# EAGLE board DARTMOBO-basic (EAGLE 7.6.0)
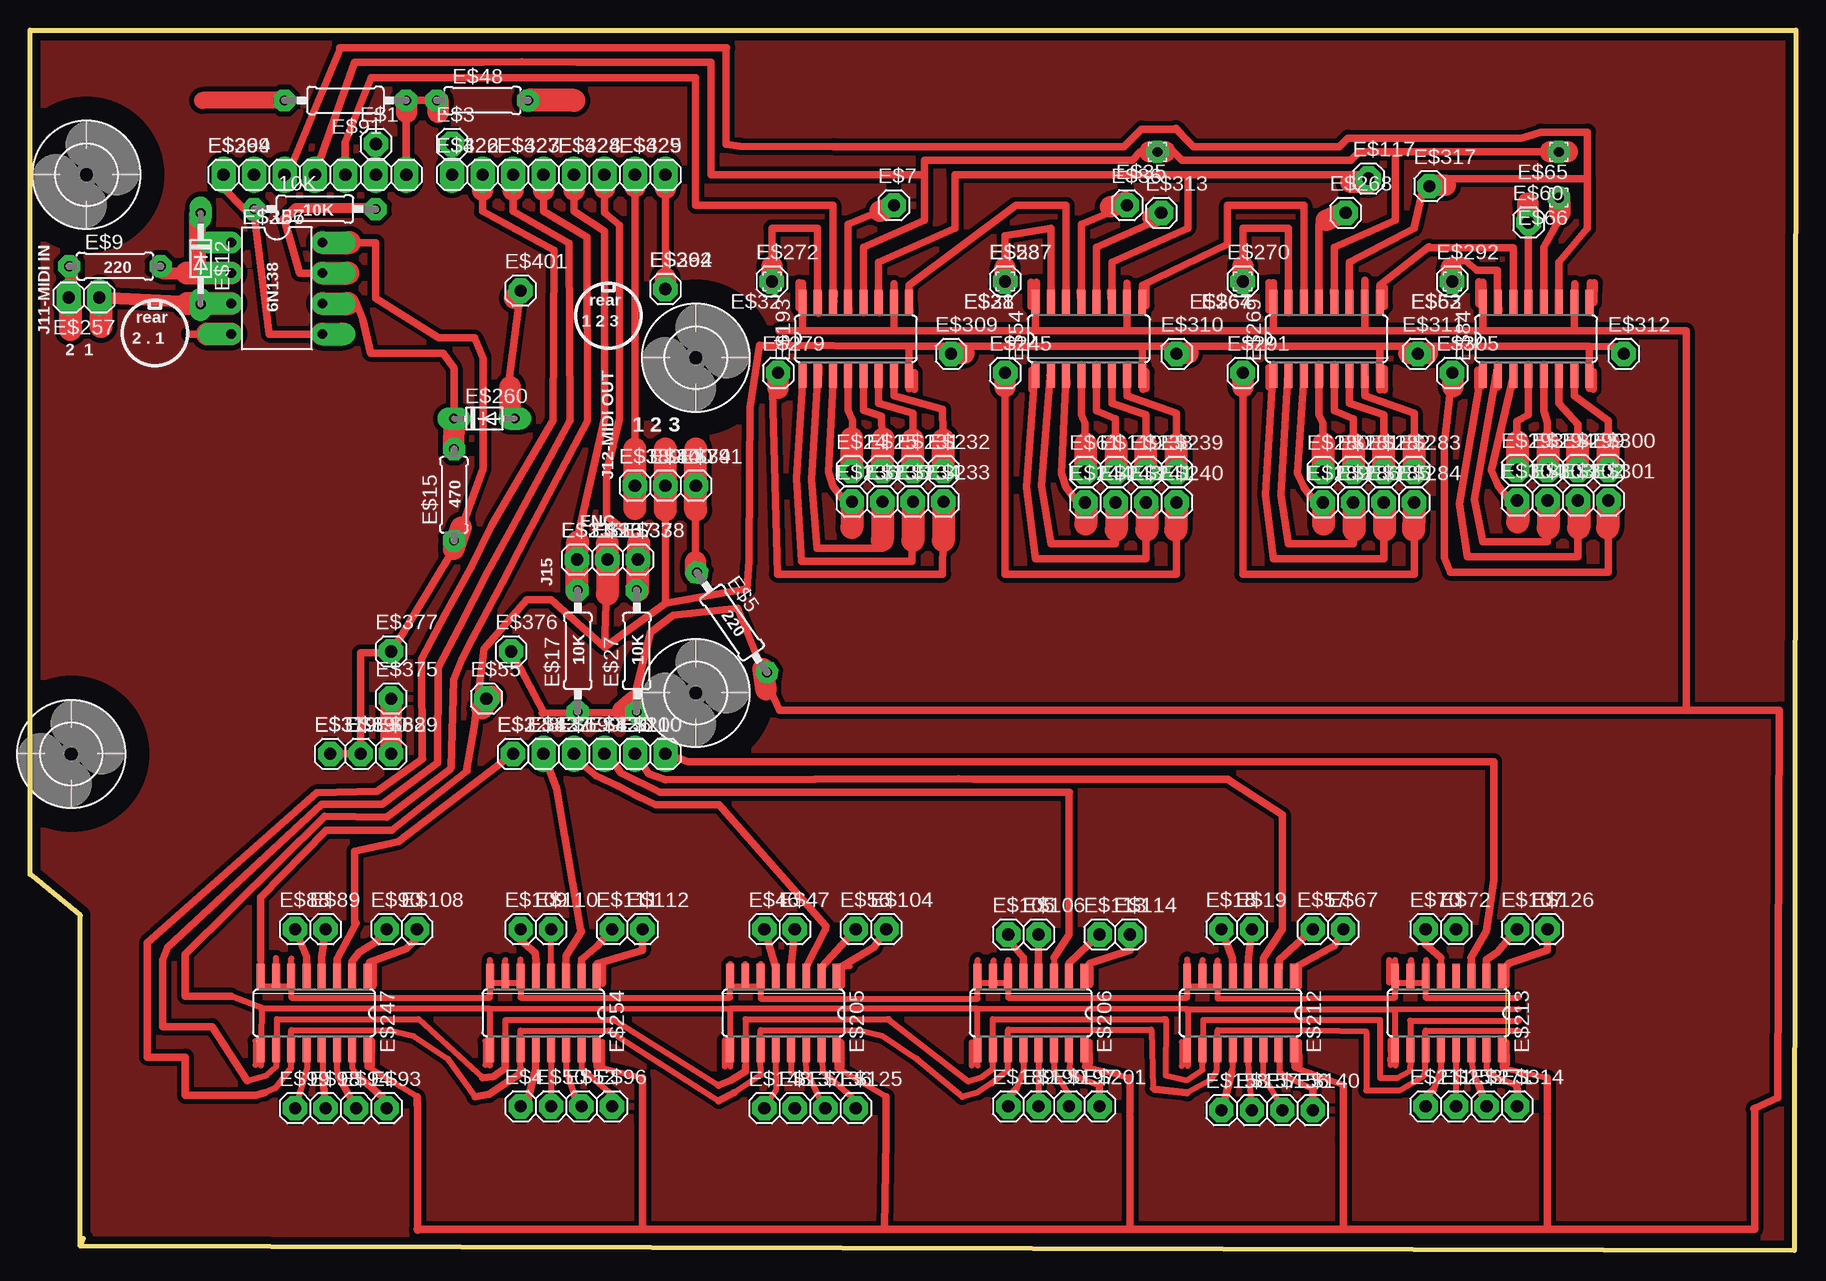
[diagram p0: board, top side]
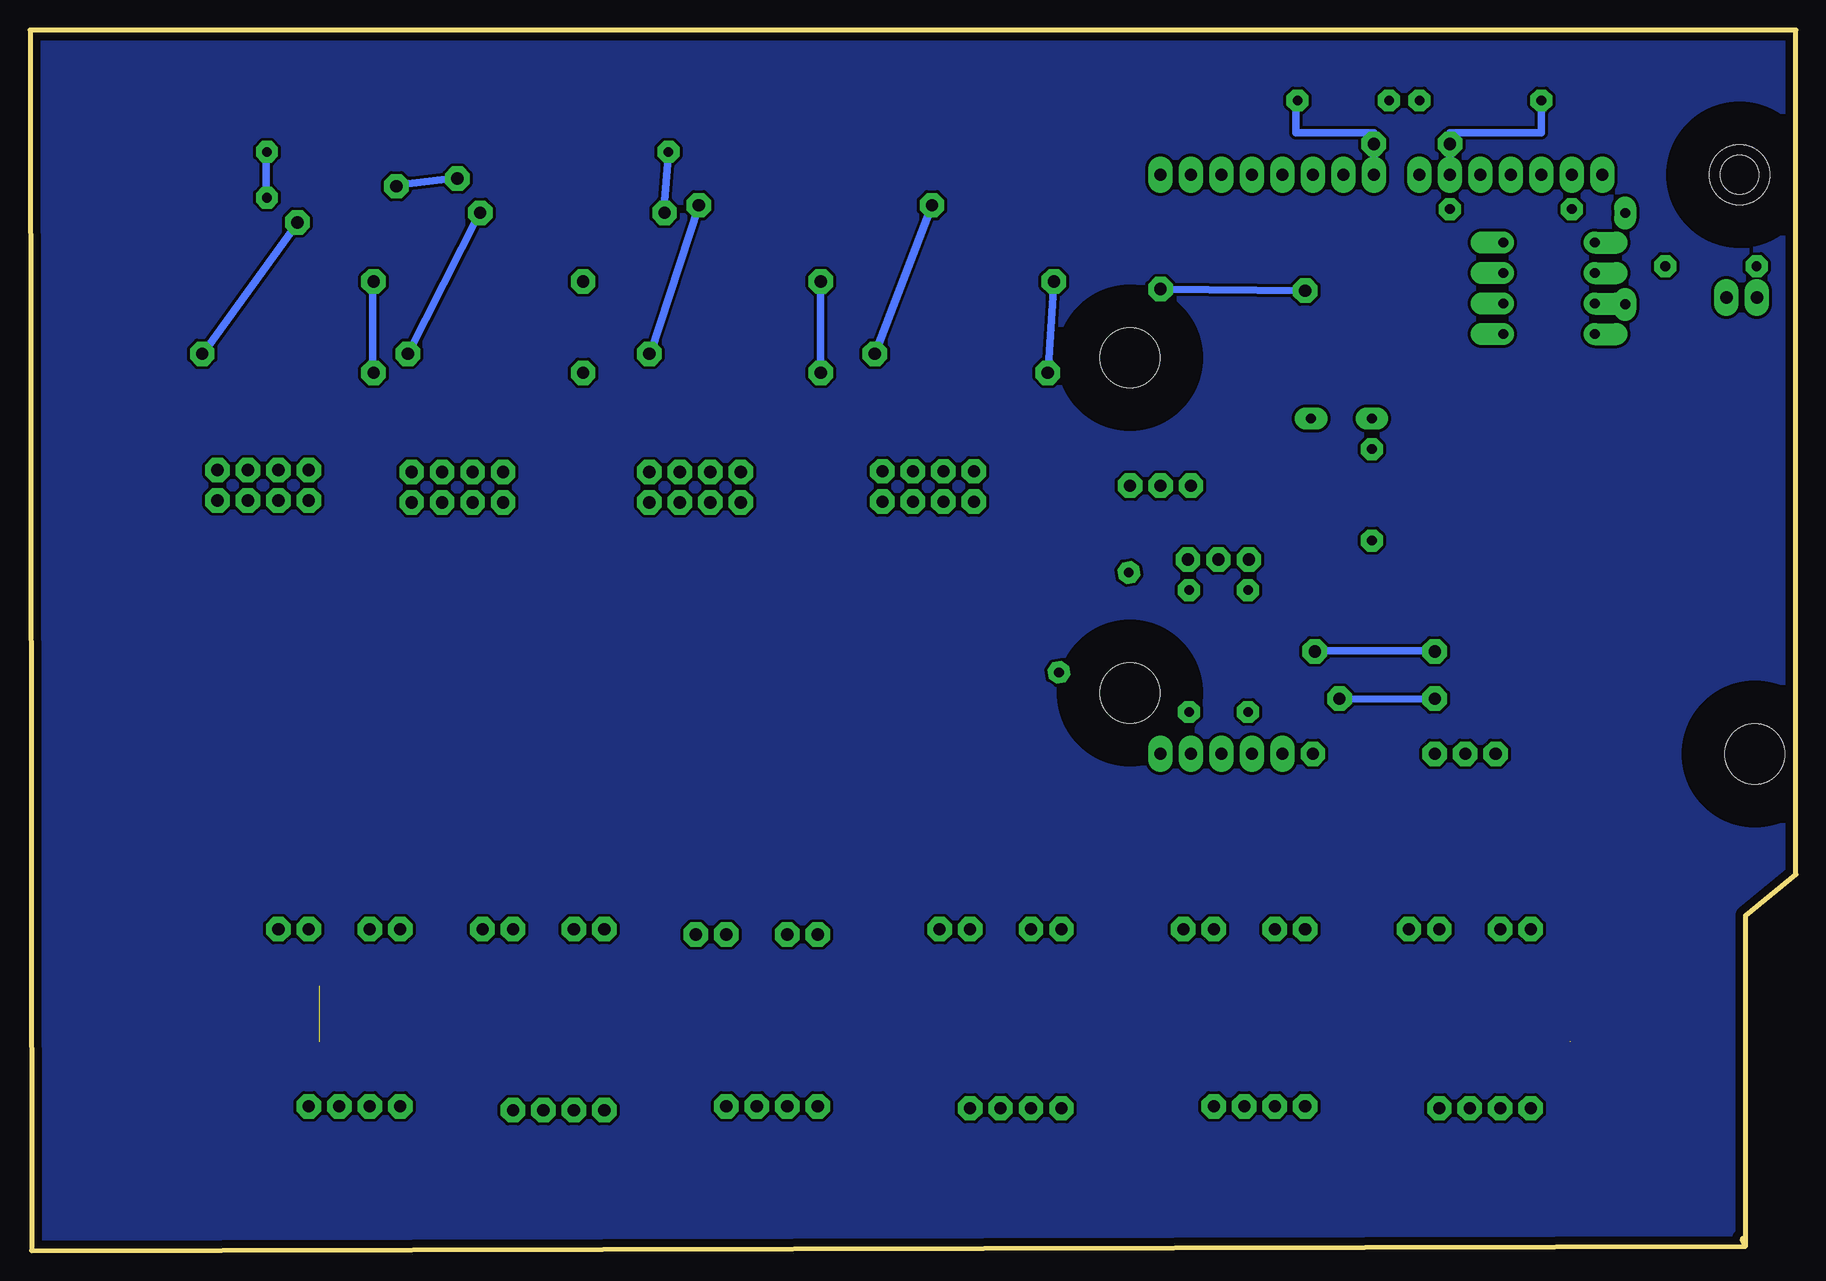
[diagram p1: board, bottom side, seen from below]

Size 147.19 x 101.73 mm. Coordinates in mm from the lower left corner, seen from the top.
Outline: 4.19,0.38 147.07,0 147.19,101.73 0,101.73 0,31.37 4.19,27.94 4.19,0.38
Outline: 4.19,0.38 4.45,1.02
Copper layers (1*16): Top 0.035mm / dielectric 1.5mm / Bottom 0.035mm
Design rules "default *": minimum track width 10mil, minimum drill 22mil, track to track 10mil, track to pad 10mil, pad to pad 10mil, via to via 12mil, smd to smd 8mil, copper to edge 26mil, drill to drill 12mil, minimum pad ring 20mil, minimum via ring 20mil, stop-mask expansion 1mil, vias tented up to drill 30mil, thermal gap 10mil
Net classes: 1 power: width 0.61 mm, drill 0.61 mm, clearance 0.254 mm; 2 gnd: width 0.305 mm, drill 0.559 mm, clearance 0.254 mm; 3 usbvcc: width 0.508 mm, drill 0.61 mm, clearance 0.254 mm; 4 aref: width 0.406 mm, drill 0.61 mm, clearance 0.254 mm
Holes 3.2 mm at 4.7,89.66 4.7,89.66

## Footprints (pad centres in the part's own frame; a part is rotated, then mirrored left to right if it is on the bottom)
0207/10 = drill 0.813 octagon: 1 -5.08,0; 2 5.08,0
1X01 = drill 1.016 octagon: 1 0,0
1X02 = drill 1.016 long: 1 -1.27,0; 2 1.27,0
0207/7 = drill 0.813 octagon: 1 -3.81,0; 2 3.81,0
DO34-7 = drill 0.813 long: A 3.81,0; C -3.81,0
1,6/0,8 = drill 0.813 pad 1.6 octagon: 1 0,0
SO16 = smd 0.66 x 2.032: 1 -4.445,-3.073; 2 -3.175,-3.073; 3 -1.905,-3.073; 4 -0.635,-3.073; 5 0.635,-3.073; 6 1.905,-3.073; 7 3.175,-3.073; 8 4.445,-3.073; 9 4.445,3.073; 10 3.175,3.073; 11 1.905,3.073; 12 0.635,3.073; 13 -0.635,3.073; 14 -1.905,3.073; 15 -3.175,3.073; 16 -4.445,3.073
DIL08 = drill 0.813 offset: 1 -3.81,-3.81; 2 -1.27,-3.81; 3 1.27,-3.81; 4 3.81,-3.81; 5 3.81,3.81; 6 1.27,3.81; 7 -1.27,3.81; 8 -3.81,3.81
DO34-5 = drill 0.813 long: A 2.54,0; C -2.54,0
1X07 = drill 1.016 long: 1 -7.62,0; 2 -5.08,0; 3 -2.54,0; 4 0,0; 5 2.54,0; 6 5.08,0; 7 7.62,0
5,0 = hole 5: 0,0

## Placement (x,y rotation side)
10K  10K  [0207/10]  23.75,86.8 0 top
E$1  [1X01]  28.83,92.23 0 top
E$2  [1X01]  40.26,41.4 0 top
E$3  [1X01]  35.18,92.23 0 top
E$4  [1X01]  40.89,12.03 0 top
E$5  [0207/10]  58.52,52.36 305 top
E$6  [1X02]  46.61,41.4 0 top
E$7  [1X01]  72.01,87.12 0 top
E$9  [0207/7]  7.08,82.04 0 top
E$11  [1X02]  51.69,41.4 0 top
E$12  [DO34-7]  14.22,82.68 270 top
E$15  [0207/7]  35.34,62.99 90 top
E$17  [0207/10]  45.66,49.97 90 top
E$18  [1X01]  99.31,26.8 0 top
E$19  [1X01]  101.85,26.8 0 top
E$21  [1X01]  45.59,57.59 0 top
E$24  [1X01]  68.52,64.96 0 top
E$25  [1X01]  71.06,64.96 0 top
E$26  [1X01]  48.13,57.59 0 top
E$27  [0207/10]  50.58,49.97 90 top
E$28  [1,6/0,8]  81.28,80.77 180 top
E$31  [1,6/0,8]  81.28,80.77 180 top
E$32  [1,6/0,8]  61.85,80.77 180 top
E$35  [1,6/0,8]  93.98,91.57 180 top
E$36  [1X01]  91.44,87.12 0 top
E$37  [1X01]  50.67,57.59 0 top
E$38  [1X01]  50.42,63.75 0 top
E$40  [1X01]  52.96,63.75 0 top
E$46  [1X01]  61.21,26.8 0 top
E$47  [1X01]  63.75,26.8 0 top
E$48  [0207/7]  37.72,95.85 0 top
E$50  [1X01]  43.43,12.03 0 top
E$52  [1X01]  45.97,12.03 0 top
E$53  [1,6/0,8]  118.55,80.77 180 top
E$54  [SO16]  88.27,76.01 0 top
E$55  [1X01]  38.04,46.01 0 top
E$56  [1X01]  68.83,26.8 0 top
E$57  [1X01]  106.93,26.8 0 top
E$58  [1X01]  81.28,80.77 0 top
E$60  [1X01]  124.9,85.69 0 top
E$61  [1X01]  87.95,64.9 0 top
E$62  [1,6/0,8]  118.55,80.77 180 top
E$64  [1,6/0,8]  101.09,80.77 180 top
E$65  [1,6/0,8]  127.44,91.57 180 top
E$66  [1,6/0,8]  127.44,87.76 180 top
E$67  [1X01]  109.47,26.8 0 top
E$68  [1X01]  30.1,41.4 0 top
E$69  [1X01]  27.56,41.4 0 top
E$70  [1X01]  116.33,26.8 0 top
E$72  [1X01]  118.87,26.8 0 top
E$79  [1X01]  55.5,63.75 0 top
E$84  [SO16]  125.54,76.01 0 top
E$88  [1X01]  22.1,26.8 0 top
E$89  [1X01]  24.64,26.8 0 top
E$90  [1X01]  29.72,26.8 0 top
E$91  [0207/10]  26.29,95.85 180 top
E$93  [1X01]  29.72,11.87 0 top
E$94  [1X01]  27.18,11.87 0 top
E$96  [1X01]  48.51,12.03 0 top
E$98  [1X01]  24.64,11.87 0 top
E$99  [1X01]  22.1,11.87 0 top
E$104  [1X01]  71.37,26.8 0 top
E$105  [1X01]  81.53,26.35 0 top
E$106  [1X01]  84.07,26.35 0 top
E$107  [1X01]  123.95,26.8 0 top
E$108  [1X01]  32.26,26.8 0 top
E$109  [1X01]  40.89,26.8 0 top
E$110  [1X01]  43.43,26.8 0 top
E$111  [1X01]  48.51,26.8 0 top
E$112  [1X01]  51.05,26.8 0 top
E$113  [1X01]  89.15,26.35 0 top
E$114  [1X01]  91.69,26.35 0 top
E$117  [1X01]  111.57,89.34 0 top
E$119  [1X01]  90.49,64.9 0 top
E$125  [1X01]  68.83,11.87 0 top
E$126  [1X01]  126.49,26.8 0 top
E$136  [1X01]  66.29,11.87 0 top
E$137  [1X01]  63.75,11.87 0 top
E$140  [1X01]  106.93,11.72 0 top
E$148  [1X01]  61.21,11.87 0 top
E$156  [1X01]  104.39,11.72 0 top
E$157  [1X01]  101.85,11.72 0 top
E$158  [1X01]  99.31,11.72 0 top
E$189  [1X01]  81.53,12.03 0 top
E$190  [1X01]  84.07,12.03 0 top
E$193  [SO16]  68.83,76.01 0 top
E$197  [1X01]  86.61,12.03 0 top
E$199  [1X02]  46.61,41.4 0 top
E$200  [1X02]  51.69,41.4 0 top
E$201  [1X01]  89.15,12.03 0 top
E$205  [SO16]  62.8,19.81 180 top
E$206  [SO16]  83.44,19.81 180 top
E$211  [1X01]  116.33,12.03 0 top
E$212  [SO16]  100.9,19.81 180 top
E$213  [SO16]  118.24,19.81 180 top
E$231  [1X01]  73.6,64.96 0 top
E$232  [1X01]  76.14,64.96 0 top
E$233  [1X01]  76.14,62.42 0 top
E$234  [1X01]  73.6,62.42 0 top
E$235  [1X01]  71.06,62.42 0 top
E$236  [1X01]  68.52,62.42 0 top
E$237  [1X01]  81.28,80.77 0 top
E$238  [1X01]  93.03,64.9 0 top
E$239  [1X01]  95.57,64.9 0 top
E$240  [1X01]  95.57,62.36 0 top
E$241  [1X01]  93.03,62.36 0 top
E$243  [1X01]  90.49,62.36 0 top
E$244  [1X01]  87.95,62.36 0 top
E$245  [1X01]  81.28,73.15 0 top
E$247  [SO16]  23.69,19.81 180 top
E$253  [1X01]  118.87,12.03 0 top
E$254  [SO16]  42.8,19.81 180 top
E$256  [DIL08]  20.57,80.2 270 top
E$257  [1X02]  4.51,79.44 180 top
E$260  [DO34-5]  37.88,69.34 0 top
E$262  [1X01]  52.96,80.14 0 top
E$264  [1X07]  23.75,89.66 0 top
E$267  [1,6/0,8]  101.09,80.77 180 top
E$268  [1X01]  109.66,86.49 0 top
E$269  [SO16]  108.08,76.01 0 top
E$270  [1X01]  101.09,80.77 0 top
E$271  [1X01]  121.41,12.03 0 top
E$272  [1X01]  61.85,80.77 0 top
E$279  [1X01]  62.36,73.15 0 top
E$280  [1X01]  107.76,64.9 0 top
E$281  [1X01]  110.3,64.9 0 top
E$282  [1X01]  112.84,64.9 0 top
E$283  [1X01]  115.38,64.9 0 top
E$284  [1X01]  115.38,62.36 0 top
E$285  [1X01]  112.84,62.36 0 top
E$286  [1X01]  110.3,62.36 0 top
E$287  [5,0]  4.7,89.66 0 top
E$288  [5,0]  3.43,41.4 0 top
E$289  [1X01]  107.76,62.36 0 top
E$291  [1X01]  101.09,73.15 0 top
E$292  [1X01]  118.55,80.77 0 top
E$293  [1X01]  123.95,65.06 0 top
E$294  [1X01]  126.49,65.06 0 top
E$295  [5,0]  55.5,46.48 0 top
E$298  [5,0]  55.5,74.42 0 top
E$299  [1X01]  129.03,65.06 0 top
E$300  [1X01]  131.57,65.06 0 top
E$301  [1X01]  131.57,62.52 0 top
E$302  [1X01]  129.03,62.52 0 top
E$303  [1X01]  126.49,62.52 0 top
E$304  [1X01]  123.95,62.52 0 top
E$305  [1X01]  118.55,73.15 0 top
E$309  [1X01]  76.77,74.74 0 top
E$310  [1X01]  95.57,74.74 0 top
E$311  [1X01]  115.7,74.74 0 top
E$312  [1X01]  132.84,74.74 0 top
E$313  [1X01]  94.3,86.49 0 top
E$314  [1X01]  123.95,12.03 0 top
E$317  [1X01]  116.65,88.71 0 top
E$319  [1X01]  25.02,41.4 0 top
E$322  [1X02]  36.45,89.66 0 top
E$323  [1X02]  41.53,89.66 0 top
E$324  [1X02]  46.61,89.66 0 top
E$325  [1X02]  51.69,89.66 0 top
E$326  [1X02]  49.15,41.4 0 top
E$327  [1X02]  44.07,41.4 0 top
E$328  [1X01]  40.26,41.4 0 top
E$329  [1X01]  30.1,41.4 0 top
E$330  [1X01]  27.56,41.4 0 top
E$336  [1X01]  45.59,57.59 0 top
E$337  [1X01]  48.13,57.59 0 top
E$338  [1X01]  50.67,57.59 0 top
E$339  [1X01]  50.42,63.75 0 top
E$340  [1X01]  52.96,63.75 0 top
E$341  [1X01]  55.5,63.75 0 top
E$375  [1X01]  30.1,46.01 0 top
E$376  [1X01]  40.1,49.94 0 top
E$377  [1X01]  30.1,49.94 0 top
E$379  [1X01]  25.02,41.4 0 top
E$387  [DIL08]  20.57,80.2 270 top
E$394  [1X01]  52.96,80.14 0 top
E$399  [1X07]  23.75,89.66 0 top
E$401  [1X01]  40.89,80.01 0 top
E$426  [1X02]  36.45,89.66 0 top
E$427  [1X02]  41.53,89.66 0 top
E$428  [1X02]  46.61,89.66 0 top
E$429  [1X02]  51.69,89.66 0 top
E$431  [1X02]  49.15,41.4 0 top
E$432  [1X02]  44.07,41.4 0 top

## Library data of the parts
10K E$5 E$9 E$15 E$17 E$27 E$48 E$91 = resistor
E$1-E$4 E$6 E$7 E$11 E$18 E$19 E$21 E$24-E$26 E$36-E$38 E$40 E$46 E$47 E$50 E$52 E$55-E$58 E$60 E$61 E$67-E$70 E$72 E$79 E$88-E$90 E$93 E$94 E$96 E$98 E$99 E$104-E$114 E$117 E$119 E$125 E$126 E$136 E$137 E$140 E$148 E$156-E$158 E$189 E$190 E$197 E$199-E$201 E$211 E$231-E$241 E$243-E$245 E$253 E$257 E$262 E$264 E$268 E$270-E$272 E$279-E$286 E$289 E$291-E$294 E$299-E$305 E$309-E$314 E$317 E$319 E$322-E$330 E$336-E$341 E$375-E$377 E$379 E$394 E$399 E$401 E$426-E$429 E$431 E$432 = pinhead
E$12 E$260 = diode
E$28 E$31 E$32 E$35 E$53 E$62 E$64-E$66 E$267 = wirepad
E$54 E$84 E$193 E$205 E$206 E$212 E$213 E$247 E$254 E$269 = 74xx-eu
E$256 E$387 = optocoupler
E$287 E$288 E$295 E$298 = holes

## Nets
S$3: E$7.1
S$8: E$91.2 E$399.6
S$9: E$256.5 E$264.1 E$387.5 E$399.1
S$11: E$70.1
S$14: E$340.1
S$21: E$28.1
S$24: E$387.6
S$25: E$426.1
S$30: E$232.1
S$39: E$56.1
S$45: E$336.1
S$49: E$26.1
S$56: E$47.1
S$57: E$2.1
S$58: E$432.1
S$83: E$387.2
S$84: E$387.3
S$87: E$387.4
S$96: E$46.1
S$100: E$57.1
S$102: E$231.1
S$103: E$25.1
S$104: E$24.1
S$105: E$236.1
S$106: E$235.1
S$107: E$234.1
S$108: E$233.1
S$113: E$67.1
S$123: E$36.1
S$124: E$239.1
S$125: E$238.1
S$126: E$119.1
S$127: E$61.1
S$128: E$244.1
S$129: E$243.1
S$130: E$241.1
S$132: E$68.1
S$141: E$240.1
S$144: E$267.1
S$145: E$32.1
S$152: E$268.1
S$156: E$283.1
S$158: E$282.1
S$159: E$281.1
S$160: E$280.1
S$161: E$53.1
S$163: E$35.1 E$65.1 E$399.4
S$168: E$60.1
S$174: E$300.1
S$176: E$299.1
S$177: E$294.1
S$179: E$293.1
S$213: E$88.1
S$214: E$89.1
S$217: E$37.1
S$218: E$90.1
S$219: E$108.1
S$220: E$69.1
S$221: E$104.1
S$229: E$256.7 E$387.7
S$244: E$21.1
S$270: E$338.1
S$271: E$256.6
S$282: E$279.1
S$285: E$264.5
S$286: E$257.2
S$287: E$256.2
S$288: E$256.3 E$257.1
S$289: E$256.4
S$291: E$18.1
S$306: E$329.1 E$375.1
S$316: E$264.7
S$321: E$19.1
S$402: E$289.1
S$403: E$286.1
S$404: E$285.1
S$405: E$284.1
S$413: E$304.1
S$414: E$303.1
S$415: E$302.1
S$416: E$301.1
S$435: E$262.1 E$394.1 E$401.1
S$522: E$31.1 E$245.1
S$534: E$55.1
VDD2: E$387.8
VDD3: E$256.8 E$330.1
VSS: E$40.1
VSS2: E$337.1

## Tracks (layer width: path | path; a pad name or v marks a point on that pad's centre or on a via)
S$1
  Top 0.61: 25.59,23.62 25.6,24.33 27.18,27.27
S$2
  Top 0.61: 44.7,24.57 45.97,26.64
S$3
  Top 0.61: E$7.1 68.2,85.53 68.2,79.82 | 68.2,79.82 68.2,78.23 | 68.2,79.82 68.26,78.23
  Top 1.778: E$7.1 70.87,86.61
  Bottom 0.61: E$7.1 76.84,74.55
S$4
  Top 0.61: 104.39,36.32 104.39,26.8
S$5
  Top 0.61: 50.42,41.4 51.56,39.75 52.96,39.24 65.44,39.31 77.41,39.34 78.65,39.31 99.85,39.31
S$6
  Top 0.508: 19.3,20.08 19.24,15.44
S$7
  Top 0.508: 58.42,20.13 38.35,20.16 | 38.35,15.44 38.35,20.16 | 38.35,20.16 19.46,20.16 16.76,21.21
  Top 0.61: 16.76,21.21 12.95,21.21 12.95,24.7 24.57,36.2 29.72,36.13 35,40.12
S$8
  Bottom 0.61: E$91.2 21.21,93.16 28.83,93.16 E$399.6
S$9
  Top 0.61: E$264.1 16.13,88.52 17.78,86.87 18.16,86.87 18.67,86.36 19.94,76.39 E$256.5
  Top 1.93: E$256.5 26.04,76.39
S$10
  Top 0.61: 120.11,24.42 121.38,26.64 122.02,30.92 122.02,40.77 54.86,40.77 52.96,41.4
S$11
  Top 0.508: 117.6,24.42 117.6,22.1
  Top 0.61: 117.6,24.42 116.33,25.53 E$70.1
S$13
  Top 0.61: 102.81,23.62 102.82,24.36 104.39,26.8
S$14
  Top 0.61: E$340.1 52.96,66.93
S$16
  Bottom 0.61: 127.51,91.57 127.51,87.76
S$18
  Top 0.508: 32.26,12.83 28.14,15.32 28.13,15.94 28.13,17.53
  Top 0.61: 32.26,12.83 32.26,12.13
S$19
  Top 0.508: 25.72,14.48 25.6,15.21 25.59,15.81 25.59,17.59
  Top 0.61: 27.18,11.87 25.72,14.48
S$20
  Top 0.508: 26.86,16 26.87,15.21 27.15,14.73
  Top 0.61: 27.15,14.73 29.72,12.51
S$21
  Top 0.61: 81.28,81.91 81.28,84.58 85.09,85.22 85.09,79.88 | 85.09,79.88 85.09,78.23 | 85.09,79.88 85.15,78.3
  Top 1.778: E$28.1 81.28,81.91
S$22
  Top 0.508: 100.27,16 100.27,15.94 100.2,14.92
  Top 0.61: 100.2,14.92 99.38,11.78
S$23
  Top 0.508: 43.43,17.46 43.43,12.03
S$24
  Top 0.61: 26.48,78.93 26.92,78.93
  Top 1.93: E$387.6 26.48,78.93
S$25
  Bottom 0.61: E$426.1 35.18,93.16 41.69,93.16 41.69,95.85
S$26
  Top 0.508: 44.7,15.68 44.7,15.01 45.34,12.99
  Top 0.61: 45.34,12.99 45.97,12.1 45.97,12.03
S$27
  Top 0.508: 45.97,15.68 45.99,15.15 48.51,12.99
  Top 0.61: 48.51,12.99 48.51,12.03
S$28
  Top 0.508: 63.44,16 63.45,14.81
S$29
  Top 0.508: 64.71,22.16 64.71,23.62
  Top 0.61: 64.71,23.62 66.29,26.8
S$30
  Top 0.61: E$232.1 76.14,66.23 76.07,70.1 72.01,71.25 72.01,73.79
S$31
  Top 0.61: 126.49,26.8 126.49,25.05 123.29,23.97 122.87,23.43
S$32
  Top 0.508: 85.34,24.42 85.34,22.16
  Top 0.61: 85.34,24.42 86.61,26.32 86.61,38.23
S$33
  Top 0.61: 81.74,25.69 82.8,24.42 82.8,23.62
S$34
  Top 0.508: 96.51,19.93 96.51,15.39
S$35
  Top 0.508: 84.07,23.49 84.07,22.16
S$36
  Top 0.61: 86.61,23.3 86.61,23.94 89.15,26.35
S$37
  Top 0.61: 91.69,26.32 91.69,25.05 88.36,23.97 88.01,23.43
S$38
  Top 0.508: 58.36,19.98 58.36,15.34
S$39
  Top 0.508: 65.98,22.1 65.98,23.62
  Top 0.61: 65.98,23.62 E$56.1
S$40
  Top 0.508: 124.08,20.13 113.79,20.1 | 113.84,15.46 113.79,20.1 | 113.79,20.1 96.36,20.1
S$41
  Top 0.508: 87.95,16 87.94,15.37 91.69,14.41
  Top 0.61: 91.69,14.41 91.69,11.56
S$42
  Top 0.508: 104.27,12.16 102.82,14.55 102.81,15.81 102.81,17.4
  Top 0.61: 104.39,11.08 104.27,12.16
S$43
  Top 0.508: 104.14,15.75 104.14,14.96 104.41,14.66 106.93,13.46
  Top 0.61: 106.93,13.46 106.93,11.72
S$44
  Top 0.508: 117.6,15.94 117.6,15.11 116.97,13.4
  Top 0.61: 116.97,13.4 116.33,12.83
S$45
  Top 0.61: 45.59,58.55 E$336.1 45.59,54.42
S$46
  Top 0.508: 118.87,15.87 118.87,17.4
S$47
  Top 0.508: 118.87,17.46 118.87,12.83
S$48
  Top 0.508: 120.2,15.81 120.24,15.01 120.78,13.78
  Top 0.61: 120.78,13.78 121.41,12
S$49
  Top 1.93: 48.13,58.93 E$26.1 48.13,54.74
S$50
  Top 0.61: 51.05,1.78 32.29,1.78 32.32,1.71 32.32,12.35 | 51.05,11.24 51.05,1.78 | 51.05,1.78 141.35,1.78
S$51
  Top 0.813: 28.7,86.87 22.1,86.87 21.21,85.98
S$52
  Top 0.508: 62.17,16 62.18,13.4 61.15,11.87
S$53
  Top 0.508: 96.46,20.13 78.99,20.16 | 78.99,16.95 78.99,20.16 | 78.99,20.16 58.32,20.16
S$56
  Top 0.61: 63.44,23.62 E$47.1
S$57
  Top 0.61: E$2.1 30.67,34.1 27.08,33.31 27.08,27.27
S$58
  Top 0.61: E$432.1 43.91,38.48 45.91,26.76
S$60
  Top 0.61: 40.84,25.93 42.11,24.82 42.23,23.88
S$61
  Top 0.508: 43.43,22.22 43.43,26.8
S$62
  Top 0.61: 45.97,23.3 45.97,24.28 47.27,25.38 48.51,26.8
S$63
  Top 0.61: 51.05,26.8 51.05,25.05 47.26,23.89 47.24,23.69
S$65
  Top 0.508: 73.91,16 71.06,17.91 69.15,18.38 60.9,18.38 60.9,15.3 60.91,14.6 58.67,13.14
  Top 0.61: 58.67,13.14 57.4,12.51
S$66
  Top 0.508: 38.35,22.35 39.62,22.35 | 39.62,22.35 40.89,22.35 40.89,21.08 58.36,21.08 58.36,22.03 60.9,22.03 60.9,21.02 78.99,21.02 78.99,24.21 | 39.62,22.35 39.62,24.22
S$67
  Top 0.508: 101.54,16 101.55,14.81 101.85,11.78
  Top 0.61: 101.85,11.78 101.85,11.65
S$68
  Top 0.508: 66.04,12.25 64.72,14.96 64.71,15.81
  Top 0.61: 66.29,11.24 66.04,12.25
S$69
  Top 0.508: 84.07,15.87 84.07,17.33
S$70
  Top 0.508: 66.04,15.94 66.08,14.96 68.83,12.51
  Top 0.61: 68.83,12.51 68.83,11.81
S$71
  Top 0.508: 82.8,15.68 82.8,14.96 82.17,13.46
  Top 0.61: 82.17,13.46 81.6,12.89
S$72
  Top 0.508: 96.46,24.26 96.46,22.03 99,22.03 99,21.02 113.79,21.08 113.79,24.21
S$73
  Top 0.508: 124.08,21.08 116.33,21.08 116.33,22.29 | 116.33,22.29 116.33,22.35 115.06,22.35 | 113.79,22.35 115.06,22.35 | 115.06,22.35 115.11,24.21 115.12,23.88 | 116.33,22.29 116.38,24.21 116.4,23.94
S$74
  Top 0.508: 121.41,15.87 121.41,15.06 122.17,14.48 123.95,13.78
  Top 0.61: 123.95,13.78 124.11,11.84
S$75
  Top 0.508: 96.46,13.14 98.45,14.25 98.93,15.05 99,18.38 107,18.38 111.38,18.29
  Top 0.61: 96.46,13.14 93.79,13.46
S$76
  Top 0.508: 112.52,19.24 97.79,19.24 97.73,15.56 97.74,15.06 96.46,14.21 94.67,14.6 94.68,19.3
S$77
  Top 0.61: 33.98,40.66 29.34,37.21 24.32,37.21 11.49,25.27 11.05,24.26 11.05,18.67 15.18,18.67 18.1,14.16
S$78
  Top 0.61: 58.04,100.23 58.04,92.2 59.15,92.04 66.99,92.01 91.19,92.01 92.65,93.47 95.44,93.47
S$79
  Top 0.508: 84.07,17.4 84.07,12.76
S$80
  Top 0.61: 120.14,23.62 120.14,24.42
S$81
  Top 0.508: 96.46,21.08 81.53,21.08 81.53,22.35 78.99,22.35
S$82
  Top 0.508: 124.05,18.35 116.33,18.35 116.33,15.05
S$83
  Top 1.93: E$387.2 13.08,81.47
S$84
  Top 1.93: E$387.3 13.14,78.93
S$86
  Top 0.508: 81.53,15.05 81.53,18.41 93.47,18.41 93.6,13.53
S$87
  Top 0.61: 14.79,76.39 13.27,76.39
  Top 1.93: E$387.4 14.79,76.39 | 5.91,78.87 5.91,77.02 | 3.37,78.61 3.37,76.77
S$89
  Top 0.508: 71.57,19.3 59.63,19.3 59.63,15.43 | 48.83,19.18 57.4,13.78
  Top 0.61: 57.4,13.78 58.42,14.2 59.64,14.96 59.63,15.43
S$90
  Top 0.61: 84.07,23.62 84.07,26.8
S$91
  Top 0.61: 24.38,14.41 24.7,11.87
S$92
  Top 0.508: 47.24,16 47.19,15.37 51.05,14.41
  Top 0.61: 51.05,14.41 51.05,10.76
S$93
  Top 0.61: 42.16,15.68 42.16,15.06 41.53,12.67 40.96,12.03
S$94
  Top 0.508: 85.34,15.68 85.34,14.91 86.61,13.02
S$95
  Top 0.508: 86.68,15.81 86.67,15.11 87.38,14.45 89.15,13.78
  Top 0.61: 89.15,13.78 89.15,12.83
S$96
  Top 0.508: 62.17,22.1 62.17,23.62
  Top 0.61: 62.17,23.62 E$46.1
S$97
  Top 0.61: 91.69,11.24 91.69,1.9
S$100
  Top 0.508: 104.14,22.03 104.14,23.62
  Top 0.61: 104.14,23.62 104.14,24.26 E$57.1
S$101
  Top 0.61: 83.82,76.64 72.01,76.64 | 72.01,76.64 64.39,76.64 | 64.39,76.64 62.42,76.64 | 64.39,80.62 64.39,76.64 | 72.01,76.64 72.01,80.59
S$102
  Top 0.61: 73.6,67.56 73.6,69.79 70.74,70.61 70.74,73.72
  Top 1.93: E$231.1 73.6,67.56
S$103
  Top 0.61: E$25.1 71.06,66.23 70.99,69.53 69.47,70.04 69.47,73.72
  Top 1.93: E$25.1 71.12,67.63
S$104
  Top 0.61: 68.52,65.85 68.58,69.22 68.2,70.04 68.2,72.14 | 68.2,72.14 68.2,73.47 | 68.14,73.66 68.2,72.14
  Top 1.93: E$24.1 68.52,65.85 68.52,67.69
S$105
  Top 0.61: 66.93,72.83 66.93,72.2 | 66.93,72.2 66.55,64.9 66.93,63.69 67.88,62.42 E$236.1 | 66.99,73.79 66.93,72.2
S$106
  Top 0.61: 65.66,72.52 65.15,64.26 65.59,58.55 71.06,58.55 71.06,59.25
  Top 1.93: E$235.1 71.06,59.25
S$107
  Top 0.61: 64.39,72.2 63.88,64.39 64.33,57.47 73.53,57.47 E$234.1
  Top 1.93: E$234.1 73.6,59.18
S$108
  Top 0.61: 61.85,73.15 62.29,56.39 76.07,56.39 E$233.1
S$109
  Top 0.61: 103.63,76.64 91.44,76.64 | 91.44,76.64 83.82,76.64 | 83.82,76.64 80.33,76.64 | 83.82,79.5 83.82,76.64 | 91.44,76.64 91.44,80.61
S$110
  Top 0.61: 99.82,83.88 92.71,80.45 92.71,78.23
S$111
  Top 0.61: 96.52,89.66 96.52,85.22 90.17,82.36 90.17,78.55
S$112
  Top 0.61: 44.64,23.69 44.7,24.42
S$113
  Top 0.61: 105.47,23.62 108.71,25.4 E$67.1
S$114
  Top 0.61: 126.49,11.24 126.49,1.78
S$115
  Top 0.508: 122.75,16 122.73,15.26 126.49,14.41
  Top 0.61: 126.49,14.41 126.49,11.56
S$116
  Top 0.508: 111.38,18.16 111.38,13.33 114.17,13.33 116.13,14.5 116.33,15.05
S$117
  Top 0.508: 112.52,19.18 112.52,14.41 114,14.4 115.06,15.01 115.06,15.37
S$118  (1 unrouted)
  Top 0.508: 123.06,23.75 123.06,22.1 | 123.06,17.4 123.09,15.47 123.06,15.94
S$119
  Top 0.61: 82.17,87.12 73.28,80.45 73.28,78.23
S$120
  Top 0.61: 93.98,85.85 88.9,83.63 88.9,78.3
S$121
  Top 0.61: 82.17,87.12 86.36,87.12 86.36,78.23
S$122
  Top 0.61: 40.26,41.4 40.26,40.77
S$123
  Top 0.61: E$36.1 87.63,85.53 87.63,78.23
  Bottom 0.61: E$36.1 95.5,74.68
S$124
  Top 0.61: E$239.1 95.57,67.18 95.57,69.79 91.44,71.25 91.44,73.15
  Top 1.93: 95.57,64.83 95.57,67.18
S$125
  Top 0.61: 93.03,67.12 93.03,69.66 90.17,70.61 90.17,72.14 | 90.17,72.14 90.17,72.83 | 90.23,73.79 90.17,72.14
  Top 1.93: E$238.1 93.03,67.12
S$126
  Top 0.61: E$119.1 90.49,69.34 88.9,69.98 88.9,73.85
S$127
  Top 0.61: E$61.1 87.95,65.53 87.63,65.53 87.95,66.17 87.95,68.96 87.63,69.66 87.63,73.85
S$128
  Top 0.61: 86.36,72.83 85.98,64.77 86.36,63.63 87.31,62.36 E$244.1
S$129
  Top 0.61: 85.09,73.79 84.33,63.75 85.09,58.93 90.49,58.93 E$243.1
S$130
  Top 0.61: 83.82,73.85 83.06,63.63 83.82,57.66 93.03,57.66 E$241.1
S$132
  Top 0.61: E$68.1 30.1,41.66 30.1,43.94
  Top 1.778: 30.1,41.66 30.1,45.66
S$141
  Top 0.61: 81.28,72.01 81.28,56.39 95.57,56.39 95.57,62.29 E$240.1
  Top 1.778: 81.28,73.15 81.28,72.01
  Top 1.93: 95.57,62.29 95.5,60.07
S$144
  Top 0.61: 101.09,82.04 101.09,85.22 104.9,85.22 104.9,78.17
  Top 1.778: E$267.1 101.09,82.04
S$145
  Top 0.61: 61.85,82.04 61.85,85.22 65.66,85.22 65.66,78.23
  Top 1.778: E$32.1 61.85,82.04
  Bottom 0.61: E$32.1 62.36,73.02
S$146
  Top 0.61: 111.25,76.64 103.63,76.64 | 103.63,76.64 100.14,76.64 | 103.63,80.68 103.63,76.64 | 111.25,76.64 111.25,80.86 | 134.37,76.64 128.71,76.64 | 128.71,76.64 121.09,76.64 | 121.09,79.5 121.09,76.64 | 128.71,76.64 128.71,79.5 | 111.25,76.64 121.09,76.64
S$147
  Top 0.61: 116.62,83.66 112.52,80.45 112.52,78.23
S$148
  Top 0.61: 115.38,85.22 109.98,82.36 109.98,79.88 | 109.98,79.88 109.98,78.55 | 109.98,79.88 109.92,78.3
S$149
  Top 0.61: 113.79,85.85 108.71,83.63 108.71,78.55
S$150
  Top 0.61: 106.17,78.23 106.17,87.12 99.82,87.12 99.82,83.88
S$151
  Top 0.61: 55.5,97.76 55.5,87.12 66.93,87.12 66.93,78.55
S$152
  Top 0.61: E$268.1 107.44,85.53 107.44,78.23
S$153
  Top 0.61: 111.25,71.25 111.25,73.15
S$154
  Top 0.61: 109.98,73.72 109.98,70.61
S$155
  Top 0.61: 108.71,69.98 108.71,72.01 | 108.71,72.01 108.71,72.52 | 108.78,73.66 108.71,72.01
S$156
  Top 0.61: 111.25,71.25 115.38,69.79 115.38,67.18 E$283.1
  Top 1.93: 115.38,64.83 115.38,67.18
S$157
  Top 0.61: 106.17,73.72 106.17,72.2
S$158
  Top 0.61: 112.84,67.12 112.84,69.66 109.98,70.61 109.98,72.14
  Top 1.93: E$282.1 112.84,67.12
S$159
  Top 0.61: E$281.1 110.3,69.34 108.71,69.98 108.71,73.85
S$160
  Top 0.61: E$280.1 107.76,65.53 107.44,65.53 107.76,66.17 107.76,68.96 107.44,69.66 107.44,73.85
S$161
  Top 0.61: E$53.1 118.55,82.52 119.67,82.52 120.59,81.72 122.33,81.72 122.33,79.79 122.37,79.76 | 122.37,79.76 122.37,78.23 | 122.37,79.76 122.43,78.3
S$162
  Top 0.61: 111.57,89.66 77.09,89.66 77.09,85.22 70.74,82.36 70.74,78.55
S$163
  Top 0.61: E$65.1 126.75,91.57 113.79,91.57 | 113.79,91.57 113.79,85.85 | 113.79,91.57 110.81,91.57 110.11,90.87 96.01,90.87 95.31,91.57 94.62,91.57 E$35.1 93.34,91.57 92.58,91.57 91.88,90.87 74.55,90.87 74.55,89.66 | E$399.4 27.05,99.03 37.72,99.03 40.97,99.08 45.59,99.03 56.77,99.03 56.77,89.66 74.55,89.66 | 74.55,89.66 74.55,85.85 69.47,83.63 69.47,78.55
  Top 1.778: 93.34,91.57 94.62,91.57 | 126.75,91.57 128.14,91.57
  Bottom 0.61: E$35.1 94.36,86.49
S$164
  Top 0.508: 20.51,22.16 20.51,24.38
S$165
  Top 0.61: 129.83,89.34 129.83,85.22 127.45,82.36 127.45,78.36 | 95.5,93.54 96.2,92.77 96.96,92.01 109.16,92.01 109.86,92.71 124.3,92.71 125.92,93.22 129.83,93.22 129.83,89.34 | 129.83,89.34 116.33,89.34 115.38,85.31
S$166
  Top 0.61: 127.45,87.76 127.45,85.85 126.18,83.63 126.18,78.23
S$167
  Top 0.61: 116.46,83.57 123.63,83.57 123.63,79.95 | 123.63,79.95 123.63,78.55 | 123.63,79.95 123.7,78.23
S$168
  Top 0.61: E$60.1 124.9,78.23
S$169
  Top 0.61: 128.71,71.25 128.71,73.15
S$170
  Top 0.61: 128.71,71.25 128.71,73.15
S$171
  Top 0.61: 127.45,73.72 127.45,70.61
S$172
  Top 0.61: 126.18,69.98 126.18,72.01
S$173
  Top 0.508: 21.78,22.16 21.78,24.37
S$174
  Top 0.61: 128.71,71.25 131.57,69.15 131.57,67.34 E$300.1
  Top 1.93: 131.57,64.99 131.57,67.34
S$175
  Top 0.508: 23.05,22.1 23.05,23.88
S$176
  Top 0.61: 129.03,67.28 129.03,68.87 127.45,70.61 127.45,72.14
  Top 1.93: E$299.1 129.03,67.28
S$177
  Top 0.61: E$294.1 126.49,69.02 126.18,69.98 126.18,73.85
S$179
  Top 0.61: E$293.1 123.95,65.69 123.63,65.69 123.95,66.33 123.95,69.12 124.9,69.66 124.9,73.85
S$180
  Top 0.61: 36.44,39.99 30.16,35.05 24.7,35.05 19.24,29.46 19.24,24.26
S$181
  Top 0.61: 45.66,41.08 45.34,41.08 47.18,39.56 49.05,38.7 50.64,37.88 52.16,37.15 57.44,37.15 66.36,27.05
S$182
  Top 0.61: 48.2,41.4 49.21,39.81 52.52,38.2 86.65,38.2
S$183
  Top 0.508: 24.32,22.1 24.32,24.19
S$184
  Top 0.508: 25.59,22.1 25.59,24.13
S$185
  Top 0.508: 26.86,22.1 26.86,23.88
S$186
  Top 0.508: 28.19,22.03 28.19,23.75
S$187
  Top 0.508: 19.24,15.94 19.24,17.72
S$188
  Top 0.508: 20.51,15.94 20.57,17.65
S$189
  Top 0.508: 23.05,15.87 23.05,17.53
S$190
  Top 0.508: 24.38,15.94 24.38,17.53
S$191
  Top 0.508: 26.86,15.94 26.86,17.53
S$192
  Top 0.508: 40.89,15.87 40.89,17.46
S$193
  Top 0.508: 42.16,15.87 42.16,17.53
S$194
  Top 0.508: 44.7,15.87 44.7,17.4
S$195
  Top 0.508: 45.97,15.75 45.97,17.27
S$196
  Top 0.508: 45.97,15.94 45.97,17.4
S$197
  Top 0.508: 47.24,16 47.24,17.4
S$198
  Top 0.508: 40.89,22.29 40.89,24.26
S$199
  Top 0.508: 42.23,22.1 42.23,23.94
S$200
  Top 0.508: 44.64,23.69 44.64,22.16
S$201
  Top 0.508: 45.97,23.81 45.97,22.16
S$202
  Top 0.508: 47.24,23.69 47.24,22.16
S$203
  Top 0.508: 58.36,22.1 58.36,23.88
S$204
  Top 0.508: 59.63,22.16 59.63,23.88
S$205
  Top 0.508: 60.9,22.1 60.9,23.88
S$206
  Top 0.508: 63.5,22.1 63.5,23.75
S$207
  Top 0.508: 67.25,22.1 67.25,23.43
S$208
  Top 0.508: 62.17,15.87 62.17,17.4
S$209
  Top 0.508: 63.44,15.87 63.44,17.4
S$210
  Top 0.508: 64.71,15.87 64.71,17.4
S$211
  Top 0.508: 66.04,15.94 66.04,17.4
S$212
  Top 0.508: 67.25,15.94 67.25,17.4
S$213
  Top 0.61: 23.05,23.62 23.06,24.51 E$88.1
S$214
  Top 0.61: 24.32,23.62 24.33,24.46 E$89.1
S$215
  Top 0.508: 19.56,13.14 20.42,13.53 21.44,14.82 21.77,15.23 21.78,15.94 21.78,18.38 29.97,18.38 31.94,17.91 34.8,16 37.08,12.83 | 40.89,15.18 40.89,18.35 48.26,18.35 57.4,12.51
  Top 0.61: 32.73,40.98 28.96,38.29 23.88,38.16 9.78,25.65 9.78,16.13 12.95,16.13 12.95,12.95 18.8,12.95 19.56,13.14 | 40.89,15.18 40.79,14.71 39.32,13.74 38.25,13.03 37.08,12.83
S$216
  Top 0.508: 19.24,24.26 19.24,22.03 21.78,22.03 21.78,21.08 38.35,21.08 38.35,24.21
S$217
  Top 0.61: 50.67,59.25 E$37.1 50.67,55.05 50.67,54.42
  Top 1.93: 50.67,55.05 50.74,58.93
S$218
  Top 0.61: 26.86,23.62 26.87,24.1 27.43,24.89 28.96,25.78 29.34,26.8 E$90.1
S$219
  Top 0.61: 28.19,23.49 28.32,24.03 31.37,25.15 32.26,26.03 E$108.1
S$220
  Top 0.61: E$69.1 25.02,41.4
S$221
  Top 0.61: E$104.1 70.36,25.27 67.37,23.49
S$222
  Top 0.508: 80.33,22.29 80.33,24.17
S$223
  Top 0.508: 81.53,22.29 81.53,24.22
S$224
  Top 0.508: 82.8,22.22 82.8,23.49
S$225
  Top 0.508: 86.68,23.56 86.68,22.16
S$227
  Top 0.61: 35.1,40.31 35.31,47.56 36,49.34 36.89,51.05 39.4,55.72 41.4,59.59 46.48,69.15 46.42,84.45 42.8,86.61 42.8,88.39
  Top 1.778: 42.8,89.66 42.8,88.39
S$228
  Top 0.508: 96.58,22.16 96.46,22.16 96.46,21.15
S$229
  Top 0.61: 21.21,85.81 22.48,81.47 E$256.7 | 26.48,81.47 26.92,81.47
  Top 1.93: E$256.7 26.48,81.47
S$230
  Top 0.508: 87.88,23.37 87.88,22.16
S$231
  Top 0.508: 24.38,15.94 24.38,14.45
S$232
  Top 0.508: 78.99,15.42 78.99,17.53
S$233
  Top 0.61: 50.42,88.65 50.42,66.8
  Top 1.778: 50.42,89.66 50.42,88.65
  Top 1.93: 50.42,61.85 50.42,66.8
S$235
  Top 1.422: 21.21,95.85 14.38,95.85
S$236
  Top 0.61: 58.07,100.23 25.81,100.23
S$239
  Top 0.61: 55.5,57.4 55.5,61.72 | 55.5,66.8 55.5,66.93
  Top 1.778: 55.5,56.52 55.5,57.4
  Top 1.93: 55.5,61.72 55.5,66.8
S$241
  Top 0.508: 18.16,14.16 19.71,14.6 20.51,15.32 20.57,19.3 32.38,19.3 37.72,14.41 | 48.83,19.24 39.62,19.24 39.62,15.62
  Top 0.61: 37.72,14.41 38.61,14.5 39.62,15.21 39.62,15.62
S$242
  Top 0.508: 82.8,17.33 82.8,15.94
S$243
  Top 0.508: 85.34,15.75 85.34,17.4
S$244
  Top 0.61: 45.59,54.42 45.59,54.99
  Top 1.93: 45.59,54.99 45.59,57.53 | 45.59,57.53 E$21.1 | 45.59,57.53 45.66,59.05
S$245
  Top 0.508: 86.68,15.81 86.68,17.4
S$246
  Top 0.508: 87.95,16 87.95,17.4
S$247
  Top 0.508: 97.73,22.1 97.74,24.21 97.73,24.13
S$248
  Top 0.508: 99,22.16 99,24.19
S$249
  Top 0.508: 100.27,22.03 100.27,23.69
S$250
  Top 0.508: 101.6,22.03 101.6,23.62
S$251
  Top 0.508: 102.81,22.03 102.81,23.75
S$252
  Top 0.508: 105.35,22.03 105.35,23.49
S$253
  Top 0.508: 100.27,15.87 100.27,17.4
S$254
  Top 0.508: 101.54,15.87 101.54,17.4
S$255
  Top 0.508: 104.14,15.94 104.14,17.4
S$256
  Top 0.508: 105.35,16 105.35,17.4
S$257
  Top 0.508: 117.6,15.87 117.6,17.46
S$258
  Top 0.508: 120.2,15.87 120.2,17.4
S$260
  Top 0.508: 121.41,15.87 121.41,17.4
S$262
  Top 0.508: 122.75,16 122.75,17.4
S$263
  Top 0.508: 120.14,23.75 120.14,22.1
S$264
  Top 0.508: 122.75,23.56 122.75,22.1
S$265
  Top 0.61: 65.72,79.82 65.72,78.11
S$266
  Top 0.61: 67.06,79.82 66.93,78.23
S$267
  Top 0.61: 69.53,79.76 69.47,78.17
S$268
  Top 0.61: 37.72,88.39 37.72,86.61 43.69,83.38 43.62,69.22 38.48,60.45 36.77,56.96 34.61,53.02 32.64,49.34 32.68,41.07
  Top 1.778: 37.72,89.66 37.72,88.39
S$269
  Top 0.61: 40.26,88.39 40.26,86.61 44.96,83.95 45.02,69.22 40,59.94 38.1,56.48 35.81,52.01 34.04,48.58 33.98,40.77
  Top 1.778: 40.26,89.66 40.26,88.39
S$270
  Top 0.61: 47.88,88.52 47.88,86.49 49.15,85.47 49.15,69.34 48.07,64.9 48.07,61.21 50.61,59.25 E$338.1 50.67,54.42
  Top 1.778: 47.88,89.66 47.88,88.52
S$271
  Top 0.61: 35.34,66.8 35.34,73.53 34.45,74.8 28.39,74.8 27.75,77.66 27.24,78.93 E$256.6
S$276
  Top 0.61: 70.8,79.88 70.8,78.17
S$277
  Top 1.422: 13.97,81.53 13.97,86.36
S$278
  pour Top (isolate 0.406): 147.07,101.47 0.64,101.47 0,102.11 0.13,31.5 4.32,28.19 4.19,0.25 147.07,0.13
S$279
  Top 1.93: 45.34,95.85 41.53,95.85
S$281
  Top 0.61: 45.34,88.39 45.34,86.61 47.88,84.96 47.88,69.34 45.78,60.01
  Top 1.778: 45.34,89.66 45.34,88.39
S$282
  Top 1.778: E$279.1 62.36,71.88
S$283
  Top 1.778: 76.84,74.8 77.85,74.8
S$284
  Top 0.61: 51.69,51.44 50.16,45.21
S$285
  Top 0.61: E$264.5 26.29,92.36 28.45,97.76 55.5,97.76
S$286
  Top 1.016: E$257.2 3.49,81.34
S$287
  Top 1.016: 11.02,81.47 E$256.2
S$288
  Top 1.016: E$257.1 E$256.3
S$289
  Top 0.61: E$256.4 13.27,76.39
S$290
  Top 0.61: 143.76,11.87 143.76,1.78 141.35,1.78
S$291
  Top 0.61: 100.27,23.62 100.23,24.36 E$18.1
S$306
  Top 0.61: E$329.1 E$375.1
S$308
  Top 1.778: 95.5,74.8 96.52,74.8
S$309
  Top 1.778: 91.31,87.38 90.04,86.99
S$310
  Top 1.778: 94.36,86.49 93.6,86.11
S$311
  Top 1.778: 114.94,74.8 116.46,74.8
S$312
  Top 1.778: 118.62,73.15 118.62,72.01
S$313
  Top 1.778: 118.49,80.77 118.49,81.91
S$314
  Top 1.778: 124.84,87.28 124.84,86.01
S$316
  Top 0.61: E$264.7 31.37,95.85 33.91,95.85
S$317
  Top 0.61: 61.21,47.94 58.99,53.53 53.59,52.96 51.69,51.5
S$318
  Top 0.508: 73.91,16 77.72,12.83 78.94,13.18 80.16,13.94 81.53,15.05
S$320
  Top 0.508: 71.5,19.3 78.21,14.11 79.3,14.45 80.26,15.16 80.26,15.37
S$321
  Top 0.61: 101.54,23.62 101.55,24.36 E$19.1
S$324
  Top 0.508: 71.37,12.83 67.31,15.21 67.31,15.94
  Top 0.61: 71.37,12.83 71.37,9.33 71.22,1.87
S$325
  Top 0.508: 94.49,19.3 80.26,19.3 80.26,15.37
S$329
  Top 0.508: 109.47,13.78 105.41,15.26 105.41,15.94
  Top 0.61: 109.47,13.78 109.47,9.33 109.47,9.18 109.47,1.87
S$330
  Top 0.508: 124.14,19.18 115.06,19.18 115.06,15.37
S$332
  Top 1.778: 127.51,87.76 127.51,86.49
S$365
  Top 1.778: 61.34,46.74 61.09,48.51
S$377
  Top 1.93: 68.52,62.36 68.52,60.26
S$378
  Top 1.93: 76.14,62.36 76.14,59.18
S$379
  Top 1.93: 76.14,64.9 76.14,67.56
S$396
  Top 1.93: 88.01,64.9 88.01,67.25
S$397
  Top 1.93: 90.55,64.83 90.55,67.18
S$398
  Top 1.93: 93.09,62.29 93.09,60.07
S$399
  Top 1.93: 90.55,62.36 90.55,60.07
S$400
  Top 1.93: 88.01,62.36 88.01,60.58
S$402
  Top 0.61: 106.17,72.83 105.66,64.77 106.17,63.63 107.12,62.36 E$289.1
S$403
  Top 0.61: 104.9,73.79 104.27,62.99 104.9,58.93 110.3,58.93 E$286.1
S$404
  Top 0.61: 103.63,73.85 103,62.99 103.63,57.66 112.84,57.66 E$285.1
S$405
  Top 0.61: 101.09,72.01 101.09,56.39 115.38,56.39 115.38,62.29 E$284.1
  Top 1.778: 101.09,73.15 101.09,72.01
  Top 1.93: 115.38,62.29 115.32,60.07
S$406
  Top 1.93: 107.82,64.9 107.82,67.25
S$407
  Top 0.61: 104.9,73.72 104.9,72.01
S$408
  Top 0.61: 103.63,72.14 103.63,73.79
S$409
  Top 1.93: 110.36,64.83 110.36,67.18
S$410
  Top 1.93: 112.9,62.29 112.9,60.07
S$411
  Top 1.93: 110.36,62.36 110.36,60.07
S$412
  Top 1.93: 107.82,62.36 107.82,60.58
S$413
  Top 0.61: 123.63,72.83 121.79,65.06 122.37,63.79 123.32,62.52 E$304.1
S$414
  Top 0.61: 122.37,73.79 120.4,62.64 121.09,59.09 126.49,59.09 E$303.1
S$415
  Top 0.61: 121.09,73.85 119.13,62.26 119.82,57.82 129.03,57.82 E$302.1
S$416
  Top 0.61: 118.55,73.15 117.89,67.28 117.89,57.75 118.4,56.55 131.57,56.55 131.57,62.45 E$301.1
  Top 1.93: 131.57,62.45 131.51,60.23
S$417
  Top 0.61: 122.37,72.52 122.37,72.01 122.3,73.85
S$418
  Top 1.93: 124.02,65.06 124.02,67.41
S$419
  Top 1.93: 126.56,64.99 126.56,67.34
S$420
  Top 1.93: 129.09,62.45 129.09,60.23
S$421
  Top 1.93: 126.56,62.52 126.56,60.23
S$422
  Top 1.93: 124.02,62.52 124.02,60.74
S$425
  Top 1.778: 49.4,44.96 50.42,45.85
S$427
  Top 1.778: 37.69,45.18 38.45,46.2
S$435
  Top 0.61: 39.91,72.26 E$401.1 | 52.96,81.03 52.96,88.52
  Top 1.778: E$401.1 40.39,79.38 | E$262.1 52.96,81.03 | 52.96,89.66 52.96,88.52
  Bottom 0.61: E$401.1 E$262.1
S$437
  Top 1.778: 40.04,69.6 40.04,72.01
S$438
  Top 1.778: 109.73,86.61 108.08,85.85
S$439
  Top 1.778: 111.63,89.03 110.11,89.03
S$440
  Top 1.778: 116.59,88.77 117.98,88.77
S$446
  Bottom 0.61: 124.84,85.69 132.84,74.68
S$450
  Top 0.61: 25.88,100.23 24.04,95.79 21.21,89.03
S$451
  Bottom 0.61: 118.62,73.15 118.62,80.77
S$452
  Bottom 0.61: 109.73,86.49 115.7,74.68
S$456
  Top 0.508: 23.05,16 23.11,16 23.11,15.24 22.1,11.87
S$458
  Top 0.406: 67.44,23.57 68.38,23.7
S$463
  Bottom 0.61: 116.71,88.77 111.51,89.41
S$466
  Top 1.778: 35.31,58.47 35.95,60.3
S$467
  Top 1.778: 35.31,66.83 35.36,69.22
S$477
  Top 1.778: 31.39,95.88 31.39,94.86
S$478
  Top 1.778: 34.04,95.78 34.04,94.86
S$480
  Top 0.61: 73.71,71.81 73.71,73.18
S$481
  Top 0.61: 64.11,78.56 64.11,80.64
S$489
  Top 0.61: 83.44,78.72 83.44,80.7
S$490
  Top 0.61: 93.04,78.77 93.04,80.34
S$491
  Top 0.61: 93.04,71.86 93.04,73.23
S$492
  Top 0.61: 83.54,71.81 83.54,73.38
S$493
  Top 0.61: 103.25,78.41 103.25,80.64
S$494
  Top 0.61: 112.9,78.72 112.9,80.24
S$495
  Top 0.61: 112.9,71.75 112.9,73.48
S$496
  Top 0.61: 103.25,72.01 103.25,73.58
S$501
  Top 0.61: 120.75,78.92 120.75,80.75
S$502
  Top 0.61: 130.35,79.02 130.4,80.64
S$503
  Top 0.61: 130.3,71.81 130.3,73.23
S$504
  Top 0.61: 120.7,71.96 120.7,73.38
S$510
  Top 0.508: 121.41,23.94 121.41,22.16
  Top 0.61: 123.95,26.8 122.33,24.87 121.41,24.26 121.41,23.94
S$522
  Bottom 0.61: E$31.1 E$245.1
S$523
  Top 0.508: 28.64,23.75 28.65,24.21 28.64,22.03
S$524
  Top 0.508: 47.75,24.09 47.75,22.22
S$525
  Top 0.508: 67.69,23.62 67.69,22.1
S$526
  Top 0.508: 88.39,23.62 88.39,22.16
S$527
  Top 0.508: 105.79,23.69 105.79,22.03
S$531
  Top 0.508: 113.28,24.21 113.28,22.35
S$532
  Top 0.508: 113.41,16.07 113.44,15.47 113.41,17.53
S$534
  Bottom 0.61: 30.1,45.97 E$55.1
S$535
  Bottom 0.61: 30.26,50.01 40,50.01
S$540  (1 unrouted)
  Top 0.508: 18.8,17.46 18.8,15.48 | 18.86,17.46 18.86,16
S$541
  Top 0.508: 28.51,15.94 28.5,15.42 28.51,17.53
S$543
  Top 0.508: 37.97,17.46 37.97,15.49
S$544
  Top 0.508: 47.69,15.94 47.7,15.47 47.69,17.4
S$546
  Top 0.61: 73.22,79.76 73.34,78.23
S$547
  Top 0.61: 64.45,73.72 64.39,72.26
S$548
  Top 0.61: 65.79,73.72 65.72,72.14
S$549
  Top 0.61: 83.88,78.3 83.88,80.7
S$550
  Top 0.61: 87.5,79.95 87.69,78.3
S$551
  Top 0.61: 90.04,79.95 90.23,78.23
S$552
  Top 0.61: 86.36,73.79 86.42,72.2
S$553
  Top 0.61: 91.5,73.85 91.5,72.07
S$554
  Top 0.61: 92.77,73.79 92.76,71.78
S$555
  Top 0.61: 108.65,80.01 108.78,78.3
S$556
  Top 0.61: 107.51,73.72 107.51,72.14
S$557
  Top 0.61: 111.25,73.79 111.32,72.01
S$558
  Top 0.61: 112.46,73.6 112.59,72.33
S$559
  Top 0.61: 121.16,78.23 121.09,80.7
S$560
  Top 0.61: 128.75,80.59 128.78,78.3
S$561
  Top 0.61: 130.05,80.64 130.05,78.17
S$562
  Top 0.61: 121.03,72.07 121.09,73.72
S$563
  Top 0.61: 123.7,72.14 123.7,73.79
S$564
  Top 0.61: 128.78,73.79 128.78,72.14
S$565
  Top 0.61: 129.92,73.79 129.98,71.88
S$567
  Top 0.508: 57.91,17.53 57.91,15.34
S$568
  Top 0.508: 67.63,16 67.67,15.37 67.63,17.4
S$570
  Top 0.508: 78.49,17.33 78.49,15.42
S$571
  Top 0.508: 88.33,15.94 88.34,15.57 88.33,17.4
S$573
  Top 0.508: 96.01,17.4 96.01,15.39
S$574
  Top 0.508: 105.79,15.94 105.82,15.42 105.79,17.4
S$575
  Top 0.61: 99.82,39.31 104.39,36.32
S$579
  pour Bottom: 0,101.73 147.19,101.73 147.07,0.13 4.19,0.38 4.19,27.94 0,31.37
S$588
  Top 0.61: 40.16,49.91 42.8,44.86
VDD
  Top 0.61: 62.48,45.05 138.05,45.05 | 138.05,45.05 145.8,45.05 145.67,12.76 | 145.67,12.76 143.76,11.87 | 62.48,45.05 61.28,47.69 | 62.48,45.05 61.21,47.75 | 143.7,11.81 145.67,12.76 | 134.4,76.64 138.05,76.64 138.05,45.05
VDD1
  Top 0.61: 50.16,44.83 45.4,44.83 42.7,44.8
VDD2
  Top 0.61: 26.61,84.01 28.19,84.01
  Top 1.93: E$387.8 26.61,84.01
VDD3
  Top 0.61: 25.02,41.4 E$330.1 27.56,49.82 30.1,49.85 35.34,58.55 37.75,65.15 37.75,74.36 37.05,76.07 34.07,76.07 28.83,79.38 28.83,84.01 E$256.8
VSS
  Top 0.61: 82.17,75.38 73.28,75.38 | 73.28,75.38 60.83,75.44 60.01,70.29 59.98,64.71 59.94,57.44 59.78,55.15 52.96,53.97 | 52.96,53.97 52.96,61.72 E$40.1 52.96,66.8 52.96,66.93 | 47.88,50.29 52.96,53.97 | 73.28,71.84 73.28,75.38
  Top 1.93: 52.96,61.72 52.96,66.8
VSS1
  Top 0.61: 132.91,75.31 129.98,75.38 | 129.98,75.38 112.52,75.38 | 129.98,72.2 129.98,75.38 | 112.52,75.38 98.55,75.38 | 112.52,71.74 112.52,75.38
VSS2
  Top 0.61: 47.88,50.29 E$337.1 | 47.88,50.29 43.43,54.23 41.4,54.23 37.85,50.16 37.02,43.62 36.39,40.09 | 47.88,50.29 52.96,53.97
VSS4
  Top 0.61: 98.55,75.38 92.71,75.38 | 92.71,75.38 82.17,75.38 | 92.71,72.2 92.71,75.38

## Text on the board
tPlace: 10K | 220 | rear | 6N138 | rear | 1 2 3 | J11-MIDI IN | 2 . 1 | 2 1 | 1 2 3 | 470 | J12-MIDI OUT | ENC | J15 | 220 | 10K | 10K
214bmp: D:/SmartProjects/Snc/a4_bn_logo2.bmp